# Altium PCB Pinout_DevKitC_PCB.PcbDoc
Units mm, origin at the board's own origin, x right, y up, seen from the top; angles counter-clockwise.
Board outline 48.2 x 27.9 mm, 2 copper layers (Top Layer, Bottom Layer); 27 components, 31 nets, 120 pads, 53 vias.
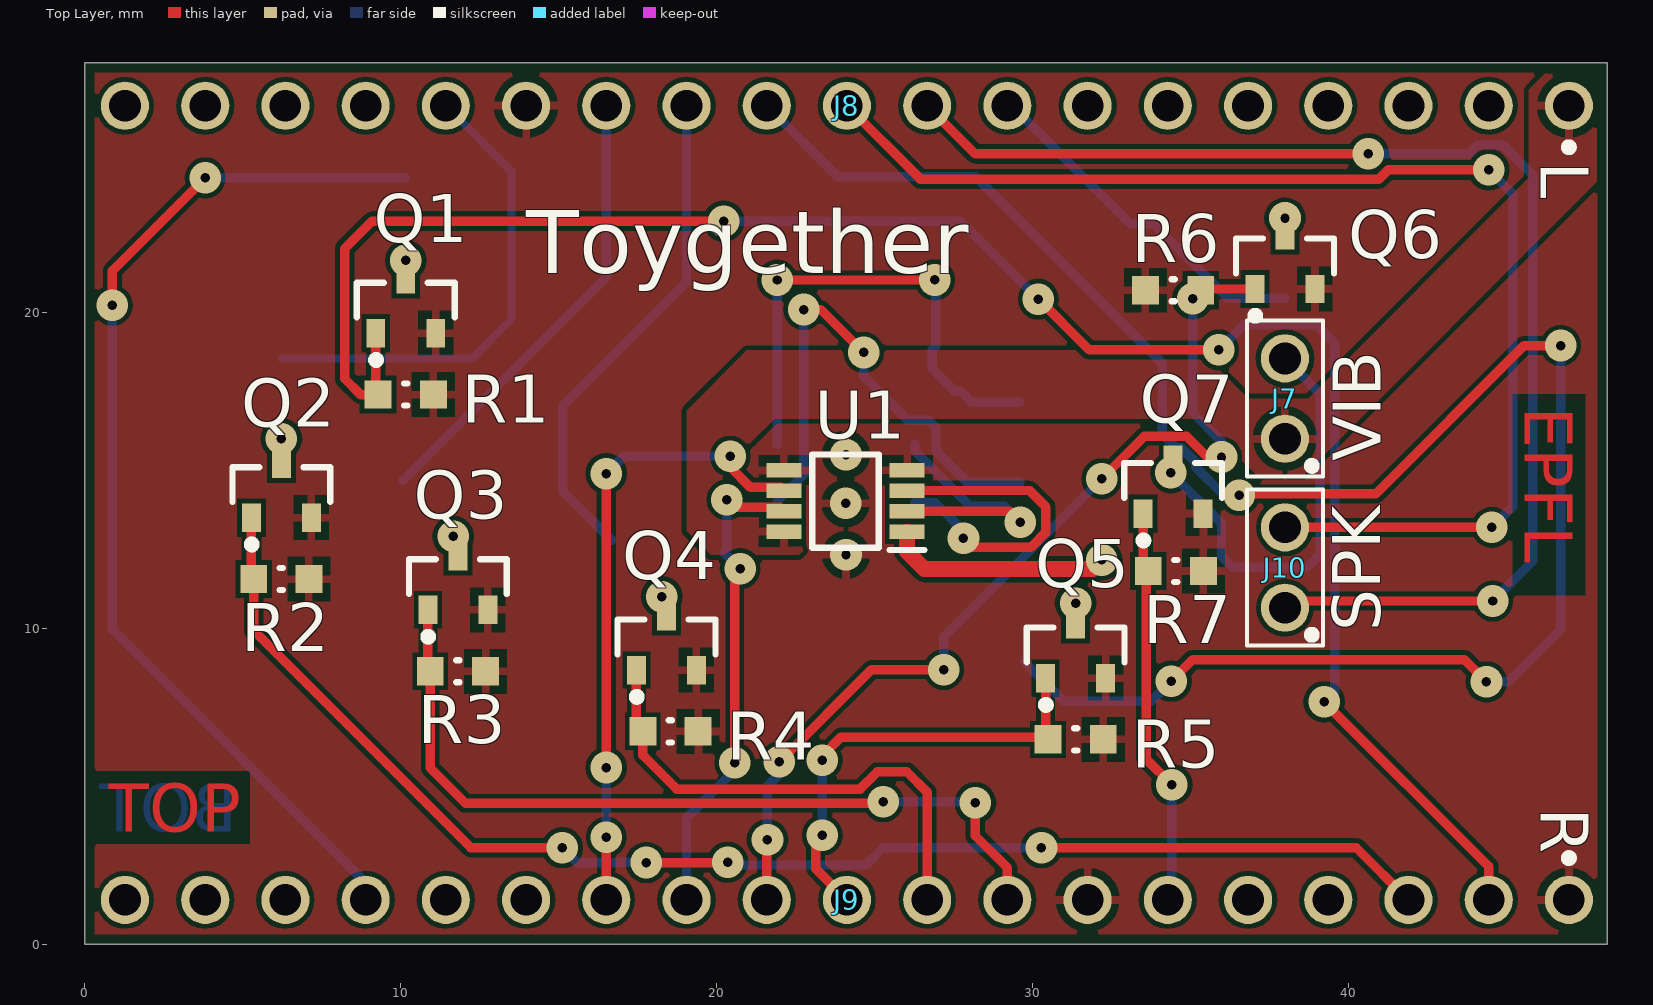
[diagram p0: Top Layer view]
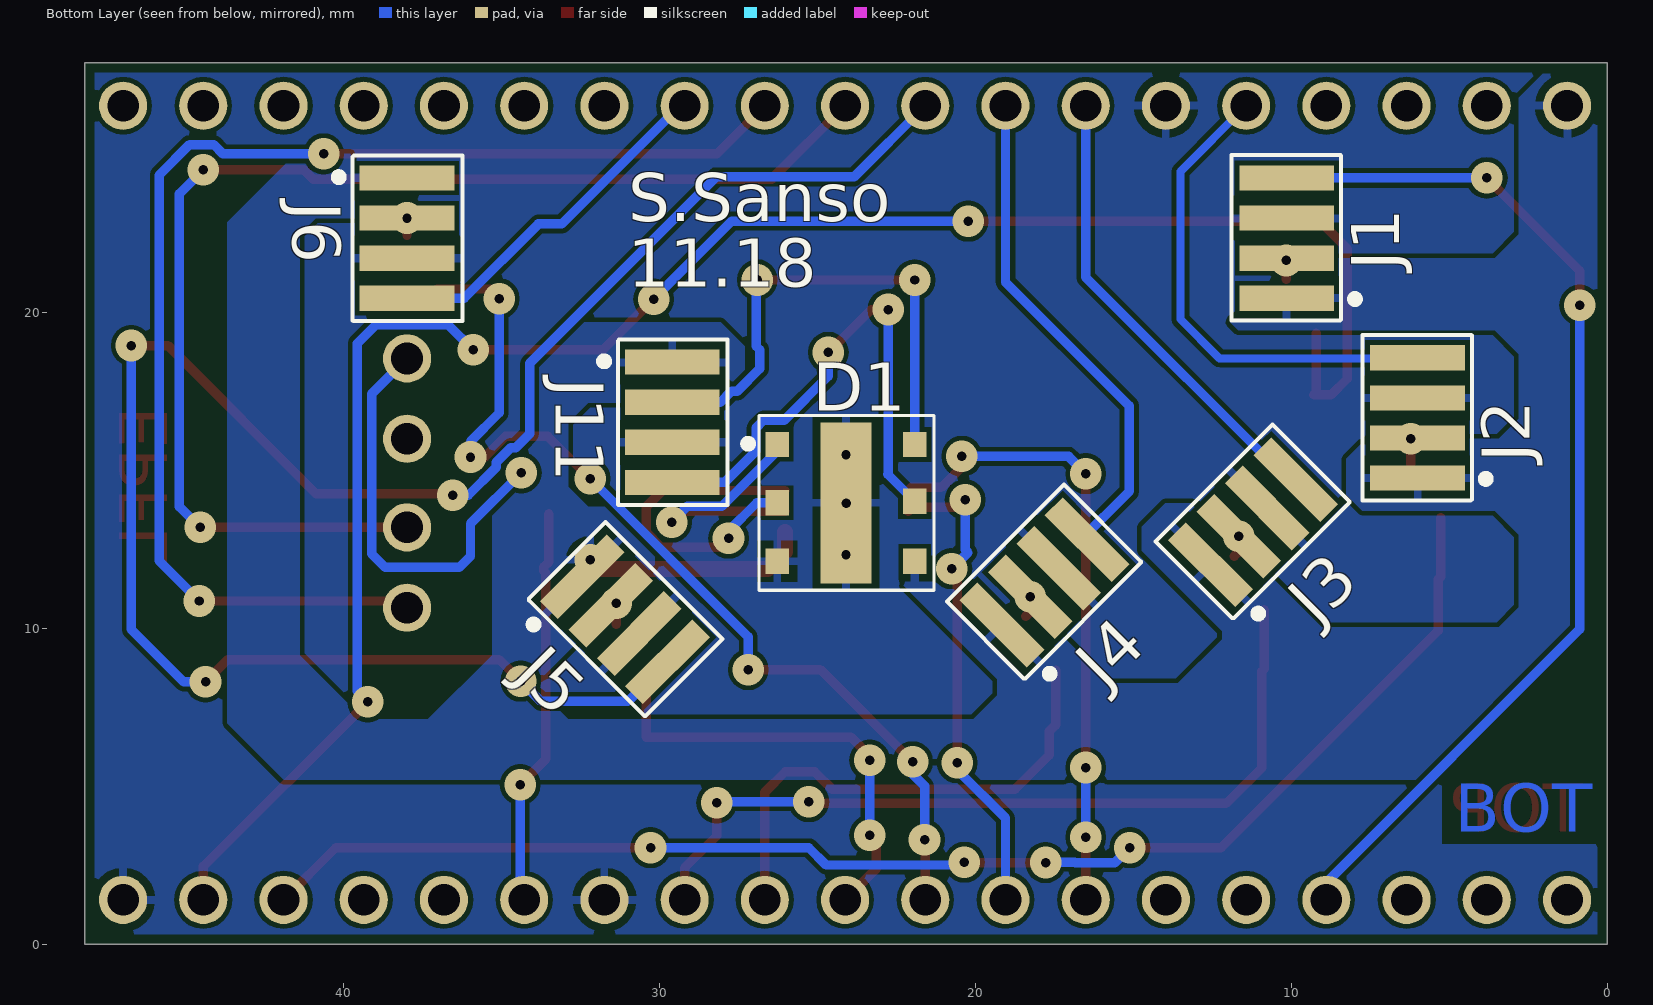
[diagram p1: Bottom Layer view, seen from below]

## Layer stack, top to bottom
Top Solder: solder mask 0.0102, Solder Resist, Dk 3.5
Top Layer: signal copper 0.0356
Dielectric 1: dielectric 0.32, FR-4, Dk 4.8
Bottom Layer: signal copper 0.0356
Bottom Solder: solder mask 0.0102, Solder Resist, Dk 3.5

## Board outline
0,0 48.2,0 48.2,27.9 0,27.9

## Design rules (kind name [scope] priority, off if disabled: settings)
BoardOutlineClearance [All] p1: gap=0.3 ignorepadtopadclearanceinfootprint=FALSE
Clearance Clearance_1 [All] p1: gap=0.15 ignorepadtopadclearanceinfootprint=TRUE
HoleSize [All] p1: absolutevalues=TRUE maxlimit=4 minlimit=0.3 maxpercent=80.000 minpercent=20.000
HoleToHoleClearance [All] p1: gap=0.35 allowstackedmicrovias=TRUE
MinimumAnnularRing [All] p1: minimumring=0.15
MinimumSolderMaskSliver [All] p1: minsoldermaskwidth=0.1
PlaneConnect [All] p1: planeconnectstyle=Relief reliefexpansion=0.3 reliefentries=4 reliefconductorwidth=0.2 reliefairgap=0.2
PolygonConnect [All] p1: connectstyle=Relief reliefconductorwidth=0.254 reliefentries=4 polygonreliefangle="90 Angle" airgapwidth=0.254
RoutingVias [All] p1: holewidth=0.5 width=1.2 viastyle="Through Hole" minholewidth=0.3 minwidth=1 maxholewidth=1.5 maxwidth=2.5
SilkToSilkClearance [All] p1 off: silktosilkclearance=0.15
SilkToSolderMaskClearance [IsPad] p1: minsilkscreentomaskgap=0.15 clearancetoexposedcopper=TRUE
SolderMaskExpansion [All] p1: expansion=0.05
UnRoutedNet [All] p1: checkbadconnections=TRUE
Width [All] p1: maxlimit=2 minlimit=0.15 preferedwidth=0.2
23 further rules are at their usual default settings.

## Components (designator, comment, footprint, x,y, rotation, side; value= is the part's Value field where it differs from the comment)
D1 "APA102C-5050" APA102C-5050 24.1,13.97 r180 bottom
J1 "EXT_CON_WIRES" EXT_CON_WIRES_4P 10.144,22.352 r90 bottom
J2 "EXT_CON_WIRES" EXT_CON_WIRES_4P 6.003,16.657 r90 bottom
J3 "EXT_CON_WIRES" EXT_CON_WIRES_4P 11.21,13.355 r135 bottom
J4 "EXT_CON_WIRES" EXT_CON_WIRES_4P 17.814,11.45 r135 bottom
J5 "EXT_CON_WIRES" EXT_CON_WIRES_4P 31.1,10.28 r225 bottom
J6 "EXT_CON_WIRES" EXT_CON_WIRES_4P 38,22.352 r270 bottom
J7 "CON_2P" CON_2P 38,16 r90 top
J8 "CON_19P" CON_19P 46.99,26.543 r180 top
J9 "CON_19P" CON_19P 46.99,1.397 r180 top
J10 "CON_2P" CON_2P 38,10.65 r90 top
J11 "EXT_CON_WIRES" EXT_CON_WIRES_4P 29.6,16.52 r270 bottom
Q1 "RUC002N05HZGT116" MOS-N_RUC002N05 10.16,20.193 r90 top
Q2 "RUC002N05HZGT116" MOS-N_RUC002N05 6.223,14.351 r90 top
Q3 "RUC002N05HZGT116" MOS-N_RUC002N05 11.811,11.43 r90 top
Q4 "RUC002N05HZGT116" MOS-N_RUC002N05 18.415,9.525 r90 top
Q5 "RUC002N05HZGT116" MOS-N_RUC002N05 31.369,9.271 r90 top
Q6 "RUC002N05HZGT116" MOS-N_RUC002N05 38,21.59 r90 top
Q7 "RUC002N05HZGT116" MOS-N_RUC002N05 34.457,14.478 r90 top
R1 "10K(5%)" RC0603 10.16,17.399 r180 top
R2 "10K(5%)" RC0603 6.221,11.557 r180 top
R3 "10K(5%)" RC0603 11.811,8.636 r180 top
R4 "10K(5%)" RC0603 18.542,6.731 r180 top
R5 "10K(5%)" RC0603 31.369,6.477 r180 top
R6 "10K(5%)" RC0603 34.457,20.701 r0 top
R7 "10K(5%)" RC0603 34.544,11.811 r180 top
U1 "SN74LVC2T45DCTRE4" VOLTAGE_TRANSLATOR_3.3-5V 24.085,14.026 r180 top

## Footprints (in the part's own frame and the unit in brackets; to place one, negate y for a bottom-side part, rotate by r counter-clockwise, add the part's x,y. Pads: shape width x height; smd on the part's side, far side on the other; paste and mask are expansions set on the pad)
APA102C-5050 [mm]
  rect 0.75x0.8 smd: 1(-2.175,1.85) 2(-2.175,0) 3(-2.175,-1.85) 4(2.175,-1.85) 5(2.175,0.05) 6(2.175,1.85)
  rect 1.6x5.1 smd: 3(0,0)
  silkscreen extent -3.22,-2.77 2.79,2.77
CON_2P [mil]
  round 60 hole 39.37: 1(0,0) 2(100,0)
  silkscreen extent -47,-47 147,47
CON_19P [mil]
  round 60 hole 39.37: 1(0,0) 2(100,0) 3(200,0) 4(300,0) 5(400,0) 6(500,0) 7(600,0) 8(700,0) 9(800,0) 10(900,0) 11(1000,0) 12(1100,0) 13(1200,0) 14(1300,0) 15(1400,0) 16(1500,0) 17(1600,0) 18(1700,0) 19(1800,0)
EXT_CON_WIRES_4P [mm]
  rect 0.8x3 smd: 1(-1.905,0) 2(-0.635,0) 3(0.635,0) 4(1.905,0)
  silkscreen extent -2.62,-2.28 2.63,1.75
MOS-N_RUC002N05 [mm] "SOT23, 3-Leads, Body 2.90x2.40mm, Pitch 0.95mm, IPC Medium Density"
  rect 0.9x0.6 smd: 1(-0.85,0.95) 2(-0.85,-0.95) 3(0.85,0)
  silkscreen extent -1.82,-1.55 0.75,1.55, body extent -1.3,-1.55 1.3,1.55, height 1.2
RC0603 [mm] "Chip Resistor, 2-Leads, Body 1.60x0.80mm, IPC Medium Density"
  rect 0.85x0.9 smd: 1(-0.875,0) 2(0.875,0)
  silkscreen extent -0.05,-0.35 0.05,0.35, body extent -0.75,-0.45 0.75,0.45, height 0.55
VOLTAGE_TRANSLATOR_3.3-5V [mm] "TSSOP, 8-Leads, Body 2,00x2,30mm, Pitch 0,50mm, IPC Medium Density"
  rect 1.1x0.45 smd: 1(-1.95,0.975) 2(-1.95,0.325) 3(-1.95,-0.325) 4(-1.95,-0.975) 5(1.95,-0.975) 6(1.95,-0.325) 7(1.95,0.325) 8(1.95,0.975)
  silkscreen extent -2.5,-1.48 1.05,1.55, body extent -2,-1.47 2,1.48, height 1.3

## Part data
D1: library part APA102C, Supplier Part Number 1=474-COM-14863, Supplier 1=Mouser
J1 J2 J3 J4 J5 J6 J11: "Pads between pinout board and wires of the plush toy"
J7 J10: "2 Positions Header, Breakaway Connector 0.100\" (2.54mm) Through Hole Tin", Supplier Part Number 1=710-61300211021, Supplier 1=Mouser
J8 J9: "19 Positions Header, Breakaway Connector 0.100\" (2.54mm) Through Hole Tin", Supplier Part Number 1=437-3108711941001101, Supplier 1=Mouser
Q1 Q2 Q3 Q4 Q5 Q6 Q7: library part MOSFET_N-CH_RUC002N05HZGT116, "RUC002N05HZGT116 (N-CH/50V/2.2R/200mA)", Supplier Part Number 1=755-RUC002N05HZGT116, Supplier 1=Mouser
R1 R2 R3 R4 R5 R6 R7: library part RES-10K(5%), "RC0603JR-0710KL", Supplier Part Number 1=603-RC0603JR-0710KL, Supplier 1=Mouser
U1: library part VOLTAGE_TRANSLATOR_3.3-5V, "Translation - Voltage Levels DUAL-BIT DUAL SUPPLY TRANSCEIVER", Supplier Part Number 1=595-SN74LVC2T45DCTR, Supplier 1=Mouser

## Via types
v1: diameter 1, hole 0.3, Top Layer to Bottom Layer, 53 vias

## Nets (pads, with @x,y where several pads share a name; then routed paths per layer and width w, separated by ;. In a path a pad name is that pad's centre, name@x,y a point inside that pad or via, vN(x,y) a via of type N, cw(c..) or ccw(c..) an arc to the next point about the centre after c; other vN are vias at no path point)
3V3: J7.1 J8.1 U1.8
5V: D1.4 J1.1 J2.1 J3.1 J4.1 J5.1 J6.1 J8.19 J11.1 U1.1 | length 7.4
  Top Layer w0.5: U1.1 26.035,12.42 26.585,11.87 31.91,11.87 v1(32.2,12.16)
  Bottom Layer w0.254: J5.1@31.909,12.16 v1(32.2,12.16)
GND: D1.3 J1.3 J2.3 J3.3 J4.3 J5.3 J6.3 J8.14 J9.1 J9.7 J11.3 Q1.2 Q2.2 Q3.2 Q4.2 Q5.2 Q6.2 Q7.2 R1.1 R2.1 R3.1 R4.1 R5.1 R6.1 R7.1 U1.4 U1.5
  other v1: 24.1,12.319 24.09,13.95 24.1,15.494
LED1: J9.2 Q1.1 R1.2 | length 61.2
  Top Layer w0.3: Q1.1 9.21,17.474 R1.2 8.731,17.399 8.23,17.9 8.23,22.02 9.1,22.89 v1(20.23,22.89) ; v1(30.19,20.42) 31.8,18.81 v1(35.9,18.81) ; v1(39.24,7.667) 44.45,2.457 J9.2
  Bottom Layer w0.3: v1(20.23,22.89) 27.72,22.89 v1(30.19,20.42) ; v1(35.9,18.81) 36.692,19.602 38.988,19.602 39.575,19.015 39.575,8.001 v1(39.24,7.667)
LED2: J9.3 Q2.1 R2.2 | length 44.2
  Top Layer w0.3: Q2.1 5.273,11.63 R2.2 5.346,9.926 12.223,3.05 v1(15.113,3.05) ; v1(17.78,2.58) 20.34,2.58 v1(20.35,2.59) ; v1(30.29,3.05) 40.257,3.05 J9.3
  Bottom Layer w0.3: v1(15.113,3.05) 15.585,2.578 16.841,2.578 16.854,2.59 17.77,2.59 v1(17.78,2.58) ; v1(20.35,2.59) 20.438,2.502 24.732,2.502 25.28,3.05 v1(30.29,3.05) v1@30.28,3.059
LED3: J9.8 Q3.1 R3.2 | length 26
  Top Layer w0.3: Q3.1 10.861,8.711 R3.2 10.936,5.574 12.054,4.455 24.865,4.455 v1@24.97,4.56 ; v1(28.194,4.468) 28.194,3.429 29.21,2.413 J9.8
  Bottom Layer w0.3: v1(25.276,4.505) 28.157,4.505 v1(28.194,4.468)
LED4: J9.9 Q4.1 R4.2 | length 16.1
  Top Layer w0.3: Q4.1 17.465,6.933 R4.2 17.667,5.978 18.739,4.905 24.545,4.905 25.097,5.457 26.023,5.457 26.67,4.81 J9.9
LED5: J9.10 Q5.1 R5.2 | length 14.2
  Top Layer w0.3: v1(23.35,3.446) 23.137,3.233 23.137,2.39 J9.10 ; v1(23.35,5.82) 23.35,5.96 23.942,6.552 30.419,6.552 Q5.1
  Bottom Layer w0.3: v1(23.35,3.446) v1(23.35,5.82)
LED6: J9.11 Q6.1 R6.2 | length 30.9
  Top Layer w0.3: J9.11 21.59,3.278 v1(21.614,3.302) ; v1(21.99,5.77) 24.91,8.69 v1(27.196,8.69) ; v1(32.2,14.73) 33.548,16.078 34.881,16.078 35.539,15.42 v1(35.99,15.42) ; v1(35.08,20.43) R6.2@35.09,20.44 ; R6.2@35.371,20.74 Q6.1
  Bottom Layer w0.3: v1(21.614,3.302) 21.614,5.004 21.99,5.38 v1(21.99,5.77) ; v1(27.196,8.69) 27.196,9.726 v1(32.2,14.73) ; v1(35.08,20.43) 35.08,16.82 35.99,15.91 v1(35.99,15.42) v1@36.126,15.42
NetD1_1: D1.1 U1.2 | length 8.2
  Top Layer w0.3: U1.2 29.281,13.701 v1(29.622,13.36)
  Bottom Layer w0.3: D1.1 26.275,15.616 28.031,13.86 29.122,13.86 v1(29.622,13.36)
NetD1_2: D1.2 U1.3 | length 10.5
  Top Layer w0.3: U1.3 26.044,14.36 29.911,14.36 30.422,13.849 30.422,13.029 29.954,12.56 28.11,12.56 v1(27.82,12.85)
  Bottom Layer w0.3: D1.2 26.927,13.97 27.82,13.077 v1(27.82,12.85)
NetD1_5: D1.5 J11.4 | length 16.4
  Top Layer w0.3: v1(22.76,20.09) 23.3,20.09 v1(24.66,18.73)
  Bottom Layer w0.3: D1.5 22.78,14.875 22.76,14.895 v1(22.76,20.09) ; v1(24.66,18.73) 24.66,17.98 26.05,16.59 26.704,16.59 26.95,16.344 26.95,15.61 27.945,14.615 J11.4
NetD1_6: D1.6 J11.2 | length 16.3
  Top Layer w0.3: v1(21.925,21.025) v1@26.909,21.025
  Bottom Layer w0.3: D1.6 v1(21.925,21.025) ; v1(26.91,21.026) 26.94,20.995 26.94,18.929 26.83,18.819 26.83,18.22 27.54,17.51 27.721,17.51 28.076,17.155 J11.2
nOUT_LED1: J1.2 Q1.3 | length 0.6
  Top Layer w0.3: Q1.3 v1(10.16,21.643)
nOUT_LED2: J2.2 Q2.3 | length 0.8
  Top Layer w0.3: Q2.3 v1(6.223,16.002)
nOUT_LED3: J3.2 Q3.3 | length 0.9
  Top Layer w0.3: v1(11.659,12.906) 11.659,12.432 Q3.3
  Bottom Layer w0.3: v1(11.659,12.906) 11.859,12.906 J3.2@11.879,12.886
nOUT_LED4: J4.2 Q4.3 | length 0.9
  Top Layer w0.3: v1(18.263,11.001) 18.263,10.527 Q4.3
  Bottom Layer w0.3: v1(18.263,11.001) 18.463,11.001 J4.2@18.483,10.981
nOUT_LED5: J5.2 Q5.3 | length 0.7
  Top Layer w0.3: Q5.3 v1(31.369,10.795)
nOUT_LED6: J6.2 Q6.3 | length 0.5
  Top Layer w0.3: Q6.3 v1(38,22.987)
nOUT_VIBRATOR: J7.2 Q7.3 | length 13.4
  Bottom Layer w0.3: v1(34.38,14.92) 35.99,13.31 35.99,12.28 36.34,11.93 38.693,11.93 39.12,12.357 39.12,17.42 J7.2
PRES_LED_CLK: J9.13 U1.6 | length 20
  Top Layer w0.3: J9.13 v1(16.51,3.378) ; v1(16.51,5.588) v1(16.51,14.896) ; v1(20.43,15.44) 20.43,15.11 21.08,14.46 22.026,14.46 U1.6
  Bottom Layer w0.3: v1(16.51,3.378) v1(16.51,5.588) ; v1(16.51,14.896) 17.054,15.44 v1(20.43,15.44)
PRES_LED_SD: J9.12 U1.7 | length 15.8
  Top Layer w0.3: v1(20.33,14.07) 20.33,13.92 20.4,13.85 20.424,13.826 22.01,13.826 U1.7 ; v1(20.58,5.74) 20.58,11.459 20.91,11.789 20.813,11.886 v1(20.75,11.886)
  Bottom Layer w0.3: J9.12 19.05,3.99 20.58,5.52 v1(20.58,5.74) ; v1(20.33,14.07) 20.33,12.486 20.24,12.396 v1(20.75,11.886)
SPK+: J8.9 J10.1 | length 41
  Top Layer w0.3: J8.9 28.194,25.019 v1(40.64,25.019) ; J10.1 38.211,10.861 v1(44.577,10.861)
  Bottom Layer w0.3: v1(40.64,25.019) 43.827,25.019 44.119,25.311 44.883,25.311 45.847,24.347 45.847,12.131 v1(44.577,10.861)
SPK-: J8.10 J10.2 | length 40.1
  Top Layer w0.3: J8.10@24.13,26.289 J8.10 26.454,24.219 40.971,24.219 41.263,24.511 v1(44.45,24.511) ; J10.2 v1(44.552,13.19)
  Bottom Layer w0.3: v1(44.45,24.511) 45.212,23.749 45.212,13.85 v1(44.552,13.19)
VIBRATOR: J9.6 Q7.1 R7.2 | length 12.7
  Top Layer w0.3: Q7.1 33.507,12.1 33.669,11.938 R7.2 33.6,11.742 33.6,5.862 v1(34.417,5.045)
  Bottom Layer w0.3: J9.6 34.417,1.524 v1(34.417,5.045)
Z1: J1.4 J9.16 | length 33.7
  Top Layer w0.3: v1(0.87,20.228) 0.87,21.317 v1(3.81,24.257)
  Bottom Layer w0.3: v1(0.87,20.228) 0.87,9.968 8.89,1.948 J9.16 ; v1(3.81,24.257) J1.4
Z2: J2.4 J8.15 | length 15.4
  Bottom Layer w0.254: J2.4@6.223,18.542 12.269,18.542 13.51,19.784 13.51,24.463 J8.15
Z3: J3.4 J8.13 | length 14.5
  Bottom Layer w0.3: J3.4@10.083,14.682 16.51,21.109 J8.13
Z4: J4.4 J8.12 | length 16
  Bottom Layer w0.3: J4.4@16.687,12.777 15.131,14.333 15.131,17.036 19.05,20.955 J8.12
Z5: J5.4 J8.11 | length 61.6
  Top Layer w0.3: v1(34.4,8.326) 35.074,9 43.68,9 v1(44.38,8.3) ; v1(36.55,14.21) 36.592,14.252 40.874,14.252 45.572,18.95 v1(46.73,18.95)
  Bottom Layer w0.3: J8.11 23.843,24.29 28.211,24.29 34.12,18.381 34.12,16.151 34.551,15.72 34.711,15.72 35.18,15.251 35.18,15.091 36.061,14.21 v1(36.55,14.21) ; J5.4 31.005,7.68 33.754,7.68 v1(34.4,8.326) ; v1(44.38,8.3) 45.07,8.3 46.73,9.96 v1(46.73,18.95)
Z6: J6.4 J8.8 | length 11.3
  Bottom Layer w0.3: J8.8 29.356,26.543 33.099,22.8 33.841,22.8 36.194,20.447 J6.4
pads on no net: J8.2 J8.3 J8.4 J8.5 J8.6 J8.7 J8.16 J8.17 J8.18 J9.4 J9.5 J9.14 J9.15 J9.17 J9.18 J9.19

## Polygon pours and split planes (outlines as drawn)
GND on Bottom Layer "Bottom Layer-GND" (solid, remove dead copper, pour order 9): -0.008,0.122 48.192,0.122 48.192,28.022 -0.008,28.022
5V on Bottom Layer "Bottom Layer-5V" (solid, remove dead copper, pour order 8): 4.572,5.207 0.254,9.525 0.254,27.051 0.762,27.559 2.032,27.559 2.794,26.797 2.794,22.479 3.556,21.717 11.684,21.717 12.319,21.082 12.319,20.066 11.684,19.431 3.556,19.431 2.794,18.669 2.794,16.635 3.429,16 7.622,16 8.255,15.367 8.255,14.222 7.749,13.716 3.556,13.716 2.794,12.954 2.794,10.668 3.429,10.033 9.037,10.033 12.954,13.95 13.99,13.95 14.732,13.208 14.732,12.446 12.192,9.906 12.192,9.652 13.589,8.255 15.748,8.255 19.558,12.065 20.32,12.827 22.479,12.827 22.733,12.573 22.733,11.811 19.304,8.382 19.304,7.874 20.066,7.112 32.893,7.112 33.655,7.874 33.655,8.509 30.162,12.002 30.162,13.467 30.539,13.843 32.258,13.843 32.893,14.478 32.893,16.51 32.258,17.145 28.067,17.145 27.305,17.907 27.305,18.923 28.067,19.685 32.512,19.685 35.306,16.891 35.306,9.144 37.338,7.112 39.37,7.112 41.402,9.144 41.402,22.479 40.894,22.987 36.576,22.987 35.941,23.622 35.941,24.765 36.195,25.019 41.529,25.019 43.688,22.86 43.688,6.985 41.91,5.207
GND on Top Layer "Top Layer-GND" (solid, remove dead copper, pour order 12): 0,0 48.2,0 48.2,27.9 0,27.9
3V3 on Top Layer "Top Layer-3V3" (solid, remove dead copper, pour order 10): 19.05,13.081 19.812,12.319 22.606,12.319 23.114,12.827 23.114,13.208 22.606,13.716 21.082,13.716 20.701,14.097 20.701,15.494 21.844,16.637 35.306,16.637 37.084,14.859 38.608,14.859 47.879,24.13 47.879,27.178 47.498,27.559 46.228,27.559 45.72,27.051 45.72,24.257 38.735,17.272 36.83,17.272 35.306,18.796 20.955,18.796 19.05,16.891

## Other copper
Top Layer:
  text "EPFL" at 45.593,17.018 h1.52 r270
  text "TOP" at 0.762,3.556 h1.52
Bottom Layer:
  text "BOT" at 4.826,3.556 h1.52

## Silkscreen, mask and mechanical layers (free items; w line width, h text height)
Top Overlay:
  circle w0.25: c46.99,25.23 r0.125
  circle w0.25: c46.99,2.72 r0.125
  text "L" at 46.101,24.765 h1.52 r270
  text "Toygether" at 13.97,21.24 h2
  text "VIB" at 41.04,15.29 h1.52 r90
  text "SPK" at 41.021,9.906 h1.52 r90
  text "R" at 46.101,4.318 h1.52 r270
Bottom Overlay:
  text "S.Sanso" at 30.998,22.888 h1.52
  text "11.18" at 31.008,20.808 h1.52
Mechanical 1:
  lines w0.127: 0,13.95 48.18,13.95 ; 24.1,0 24.1,27.9 ; 0,0 0,27.9 48.2,27.9 48.2,0 0,0
Mechanical 2:
  lines w0.127: 0.254,9.525 4.572,5.207 41.91,5.207 43.688,6.985 43.688,22.86 41.529,25.019 41.402,25.019 41.148,25.019 36.195,25.019 35.941,24.765 35.941,23.622 36.576,22.987 40.894,22.987 41.402,22.479 41.402,9.144 39.37,7.112 37.338,7.112 35.306,9.144 35.306,16.891 32.512,19.685 28.067,19.685 27.305,18.923 27.305,17.907 28.067,17.145 32.258,17.145 32.893,16.51 32.893,14.478 32.258,13.843 30.539,13.843 30.162,13.467 30.162,12.002 33.655,8.509 33.655,7.874 32.893,7.112 32.512,7.112 20.066,7.112 19.304,7.874 19.304,8.382 22.733,11.811 22.733,12.573 22.479,12.827 20.32,12.827 19.558,12.065 15.748,8.255 13.589,8.255 12.192,9.652 12.192,9.906 14.732,12.446 14.732,13.208 13.99,13.95 12.954,13.95 9.037,10.033 3.429,10.033 2.794,10.668 2.794,12.954 3.556,13.716 7.749,13.716 8.255,14.222 8.255,15.367 7.622,16 3.429,16 2.794,16.635 2.794,18.669 3.556,19.431 11.684,19.431 12.319,20.066 12.319,21.082 11.684,21.717 6.223,21.717 3.556,21.717 2.794,22.479 2.794,26.797 2.032,27.559 0.762,27.559 0.254,27.051 0.254,9.525
Mechanical 3:
  lines w0.127: 19.05,13.081 19.05,16.891 20.955,18.796 35.306,18.796 36.83,17.272 38.735,17.272 45.72,24.257 45.72,27.051 46.228,27.559 47.498,27.559 47.879,27.178 47.879,24.13 38.608,14.859 37.465,14.859 37.084,14.859 35.306,16.637 21.844,16.637 20.701,15.494 20.701,14.097 21.082,13.716 22.606,13.716 23.114,13.208 23.114,12.827 22.606,12.319 19.812,12.319 19.05,13.081